# EAGLE board OpenBook_PCB (EAGLE 9.7.0)
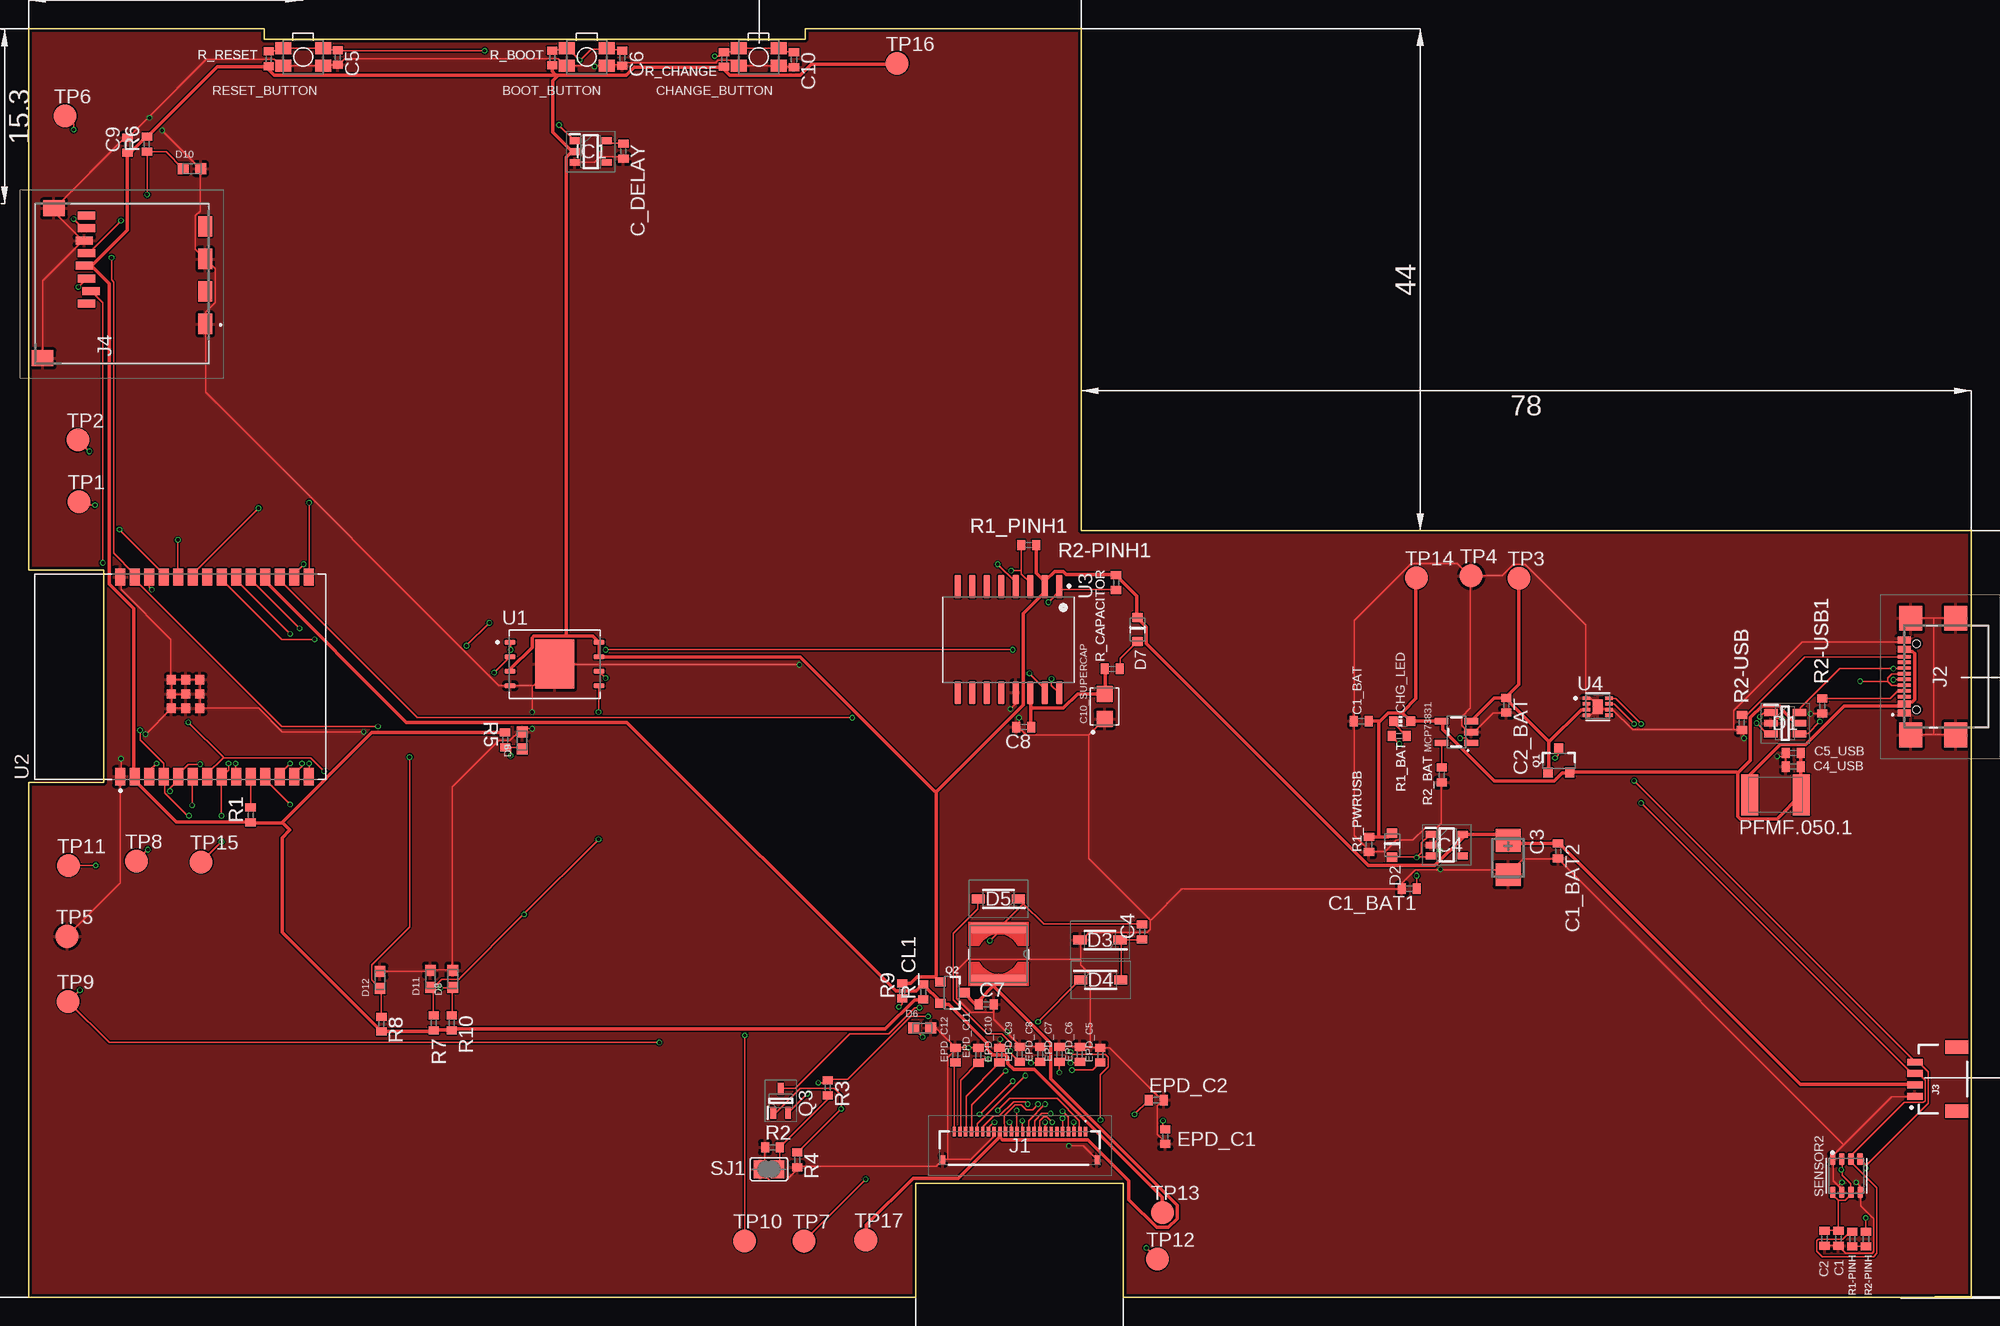
[diagram p0: board, top side]
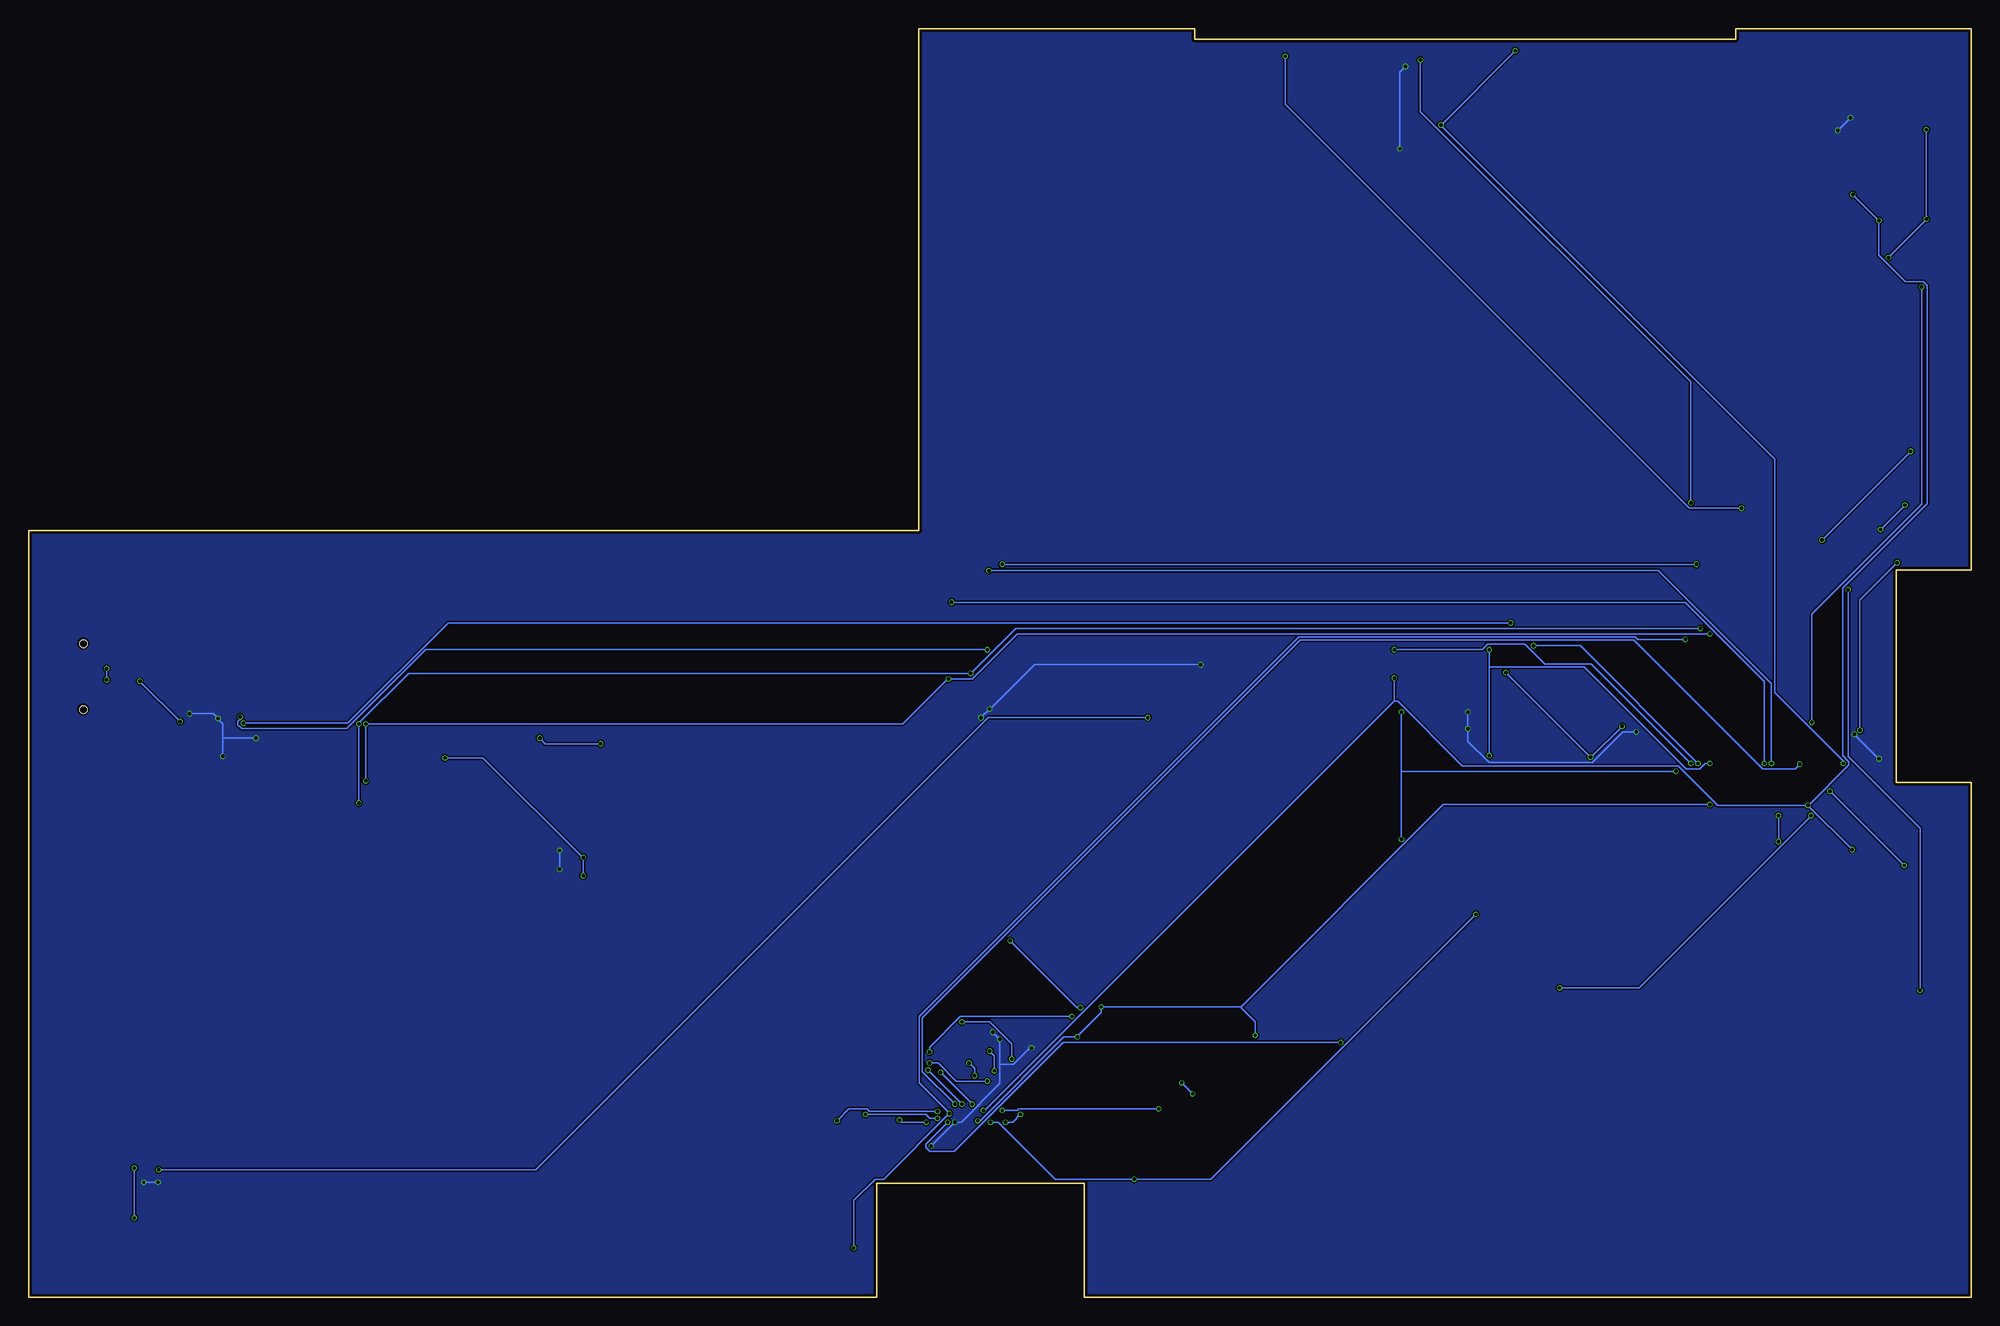
[diagram p1: board, bottom side, seen from below]

Size 170.2 x 111.2 mm. Coordinates in mm from the lower left corner, seen from the top.
Outline: 0,111.2 0,63.75 6.6,63.75 6.6,45.15 0,45.15 0,0 77.71,0 77.71,10 95.91,10 95.91,0 170.2,0 170.2,67.2 92.2,67.2 92.2,111.2 68.03,111.2 68.03,110.26 20.65,110.26 20.65,111.2 0,111.2
Copper layers (1*16): Top 0.035mm / dielectric 1.6mm / Bottom 0.035mm
Design rules "jlcpcb-2layers.dru *": minimum track width 0.15mm, minimum drill 0.3mm, track to track 5mil, track to pad 5mil, pad to pad 5mil, via to via 5mil, smd to smd 5mil, copper to edge 0.2mm, drill to drill 6mil, minimum pad ring 10mil, minimum via ring 3mil, stop-mask expansion 4mil, vias tented up to drill 0mil, thermal gap 10mil
Net classes: 2 POWER: width 0.3 mm

## Footprints (pad centres in the part's own frame; a part is rotated, then mirrored left to right if it is on the bottom)
MYBUTTON = smd 1.4 x 1.05: 1 1.75,0.75; 2 -1.75,0.75; 3 -1.75,-0.75; 4 1.75,-0.75
ESP32_WROVER_EAGLE-LTSPICE_C0402 = smd 0.7 x 0.9: 1 -0.65,0; 2 0.65,0
RCL_CT3528 = smd 2 x 2.2: + -1.5,0; - 1.5,0
CAPCP3225X100N = smd 1.4 x 1.4: 1 -1.1,0; 2 1.1,0
ADAFRUIT_CHIP-LED0603 = smd 0.8 x 0.8: A 0,-0.75; C 0,0.75
SOT95P280X145-6N = smd 1.2 x 0.6: 1 -1.25,0.95; 2 -1.25,0; 3 -1.25,-0.95; 4 1.25,-0.95; 5 1.25,0; 6 1.25,0.95
ESP32_WROVER_AVX---SD0805S020S1R0_AVX_SD0805S020S1R0_0 = smd 0.8 x 0.9: 1 -1.05,0; 2 1.05,0
SOD3716X135N = smd 1.15 x 0.8: 1 -1.75,0; 2 1.75,0
DIOC1608X36N = smd 0.97 x 0.94: 1 -0.75,0; 2 0.75,0
SOT95P280X125-5N = smd 0.9 x 0.6: 1 -1.4,0.95; 2 -1.4,0; 3 -1.4,-0.95; 4 1.4,-0.95; 5 1.4,0.95
SOT95P280X120-5N = smd 0.9 x 0.6: 1 -1.4,0.95; 2 -1.4,0; 3 -1.4,-0.95; 4 1.4,-0.95; 5 1.4,0.95
FH34SRJ24S05SH99 = smd 0.3 x 0.8: 1 5.75,1.45; 2 5.25,1.45; 3 4.75,1.45; 4 4.25,1.45; 5 3.75,1.45; 6 3.25,1.45; 7 2.75,1.45; 8 2.25,1.45; 9 1.75,1.45; 10 1.25,1.45; 11 0.75,1.45; 12 0.25,1.45; 13 -0.25,1.45; 14 -0.75,1.45; 15 -1.25,1.45; 16 -1.75,1.45; 17 -2.25,1.45; 18 -2.75,1.45; 19 -3.25,1.45; 20 -3.75,1.45; 21 -4.25,1.45; 22 -4.75,1.45; 23 -5.25,1.45; 24 -5.75,1.45 | smd 0.4 x 0.8: MP1 6.75,-1.05; MP2 -6.75,-1.05
SAMACSYS_PARTS_USB4110GFA = smd 0.3 x 1.15: A1 -3.35,3.678; A4 -2.55,3.678; A5 -1.25,3.678; A6 -0.25,3.678; A7 0.25,3.678; A8 1.25,3.678; A9 2.55,3.678; A12 3.35,3.678; B1 3.05,3.678; B4 2.25,3.678; B5 1.75,3.678; B6 0.75,3.678; B7 -0.75,3.678; B8 -1.75,3.678; B9 -2.25,3.678; B12 -3.05,3.678 | smd 2.18 x 2: MP1 -5.11,-0.827; MP2 5.11,-0.827; MP3 -5.11,3.103; MP4 5.11,3.103 | hole 0.65: -2.89,2.603; 2.89,2.603
JST04_1MM_RA = smd 0.6 x 1.35: 1 -1.5,0; 2 -0.5,0; 3 0.5,0; 4 1.5,0 | smd 1.2 x 2: NC1 2.8,-3.675; NC2 -2.8,-3.675
112ATAARR03ATTEND = smd 1.8 x 1.2: G1 10.6,10.4; G2 4.9,10.4; S1 7.75,10.4; S2 2.05,10.4 | smd 1.4 x 1.9: G3 13.6,-3.85; G4 0.45,-2.85 | smd 0.7 x 1.5: P1 8.8,0; P2 7.7,0.4; P3 6.6,0; P4 5.5,-0.2; P5 4.4,0; P6 3.3,-0.2; P7 2.2,0; P8 1.1,0
IND_4828-WE-TPC_WRE = smd 0.889 x 4.826: 1 -2.286,0; 2 2.286,0
ESP32_WROVER_SPARKFUN-IC-POWER_SOT23-5 = smd 0.55 x 1.2: 1 -0.95,-1.3; 2 0,-1.3; 3 0.95,-1.3; 4 0.95,1.3; 5 -0.95,1.3
ESP32C6_VARISTOR_CT/CN1812 = smd 1.5 x 3.6: 1 -2.25,0; 2 2.25,0
ESP32_WROVER_SPARKFUN-DISCRETESEMI_SOT23-3 = smd 0.8 x 0.9: 1 -0.95,-1; 2 0.95,-1; 3 0,1.1
SOT65P210X110-3N = smd 1.05 x 0.5: 1 -1.05,0.65; 2 -1.05,-0.65; 3 1.05,0
ESP32_WROVER_BME680_PSON80P300X300X100-8N = smd 1.016 x 0.5: 1 1.458,1.2; 2 1.458,0.4; 3 1.458,-0.4; 4 1.458,-1.2; 5 -1.458,-1.22; 6 -1.458,-0.4; 7 -1.458,0.4; 8 -1.458,1.2
SJ = smd 1.168 x 1.6: 1 -0.762,0; 2 0.762,0
TP20R = smd 2 x 2: TP 0,0
SON127P600X800X80-9N = smd 0.94 x 0.44: 1 -3.895,1.905; 2 -3.895,0.635; 3 -3.895,-0.635; 4 -3.895,-1.905; 5 3.895,-1.905; 6 3.895,-0.635; 7 3.895,0.635; 8 3.895,1.905 | smd 3.4 x 4.3: 9 0,0
XCVR_ESP32-C6-WROOM-1-N8 = smd 1.5 x 0.9: 1 -8.75,5.26; 2 -8.75,3.99; 3 -8.75,2.72; 4 -8.75,1.45; 5 -8.75,0.18; 6 -8.75,-1.09; 7 -8.75,-2.36; 8 -8.75,-3.63; 9 -8.75,-4.9; 10 -8.75,-6.17; 11 -8.75,-7.44; 12 -8.75,-8.71; 13 -8.75,-9.98; 14 -8.75,-11.25; 15 8.75,-11.25; 16 8.75,-9.98; 17 8.75,-8.71; 18 8.75,-7.44; 19 8.75,-6.17; 20 8.75,-4.9; 21 8.75,-3.63; 22 8.75,-2.36; 23 8.75,-1.09; 24 8.75,0.18; 25 8.75,1.45; 26 8.75,2.72; 27 8.75,3.99; 28 8.75,5.26 | smd 0.8 x 0.8: 29_1 -2.755,0.79; 29_2 -1.505,0.79; 29_3 -0.255,0.79; 29_4 -2.755,-0.46; 29_5 -1.505,-0.46; 29_6 -0.255,-0.46; 29_7 -2.755,-1.71; 29_8 -1.505,-1.71; 29_9 -0.255,-1.71
SOIC127P1032X265-16N = smd 2.05 x 0.59: 1 -4.655,4.445; 2 -4.655,3.175; 3 -4.655,1.905; 4 -4.655,0.635; 5 -4.655,-0.635; 6 -4.655,-1.905; 7 -4.655,-3.175; 8 -4.655,-4.445; 9 4.655,-4.445; 10 4.655,-3.175; 11 4.655,-1.905; 12 4.655,-0.635; 13 4.655,0.635; 14 4.655,1.905; 15 4.655,3.175; 16 4.655,4.445
SON50P200X200X80-9N = smd 0.76 x 0.3: 1 -0.985,0.75; 2 -0.985,0.25; 3 -0.985,-0.25; 4 -0.985,-0.75; 5 0.985,-0.75; 6 0.985,-0.25; 7 0.985,0.25; 8 0.985,0.75 | smd 0.9 x 1.3: 9 0,0

## Placement (x,y rotation side)
BOOT_BUTTON  BUTTON_CUSYOMV11  [MYBUTTON]  48.9,108.71 180 top
C1  100nF  [ESP32_WROVER_EAGLE-LTSPICE_C0402]  158.55,5.18 270 top
C1_BAT  4.7uF  [ESP32_WROVER_EAGLE-LTSPICE_C0402]  116.74,50.5 180 top
C1_BAT1  4.7uF  [ESP32_WROVER_EAGLE-LTSPICE_C0402]  120.95,35.82 180 top
C1_BAT2  4.7uF  [ESP32_WROVER_EAGLE-LTSPICE_C0402]  133.99,39.12 270 top
C2  100nF  [ESP32_WROVER_EAGLE-LTSPICE_C0402]  157.33,5.18 270 top
C2_BAT  4.7uF  [ESP32_WROVER_EAGLE-LTSPICE_C0402]  129.45,51.9 270 top
C3  100uF TANT  [RCL_CT3528]  129.61,38.55 270 top
C4  4.7uF/25V  [ESP32_WROVER_EAGLE-LTSPICE_C0402]  97.55,32.04 90 top
C4_USB  100nF  [ESP32_WROVER_EAGLE-LTSPICE_C0402]  154.6,46.52 180 top
C5  1uF  [ESP32_WROVER_EAGLE-LTSPICE_C0402]  27.09,108.66 270 top
C5_USB  4.7uF  [ESP32_WROVER_EAGLE-LTSPICE_C0402]  154.58,47.72 180 top
C6  100nF  [ESP32_WROVER_EAGLE-LTSPICE_C0402]  52.01,108.61 270 top
C7  10uF  [ESP32_WROVER_EAGLE-LTSPICE_C0402]  83.9,25.68 0 top
C8  100nF  [ESP32_WROVER_EAGLE-LTSPICE_C0402]  87.19,49.98 180 top
C9  100nF  [ESP32_WROVER_EAGLE-LTSPICE_C0402]  8.67,100.98 90 top
C10  100nF  [ESP32_WROVER_EAGLE-LTSPICE_C0402]  67.05,108.48 270 top
C10_SUPERCAP  CPH3225A  [CAPCP3225X100N]  94.26,51.79 90 top
C_DELAY  100nF  [ESP32_WROVER_EAGLE-LTSPICE_C0402]  52.11,100.44 270 top
CHANGE_BUTTON  BUTTON_CUSYOMV11  [MYBUTTON]  63.96,108.71 180 top
CHG_LED  [ADAFRUIT_CHIP-LED0603]  120.34,50.5 90 top
D1  USBLC6-2SC6Y  [SOT95P280X145-6N]  153.88,50.32 0 top
D2  ESP32_WROVER_AVX---SD0805S020S1R0_AVX_SD0805S020S1R0_0_0  [ESP32_WROVER_AVX---SD0805S020S1R0_AVX_SD0805S020S1R0_0]  119.45,39.63 270 top
D3  MBR05301  [SOD3716X135N]  93.86,31.32 180 top
D4  MBR05301  [SOD3716X135N]  93.92,27.83 0 top
D5  MBR05301  [SOD3716X135N]  84.96,34.93 180 top
D6  PGB1010603MR1  [DIOC1608X36N]  78.28,23.62 0 top
D7  ESP32_WROVER_AVX---SD0805S020S1R0_AVX_SD0805S020S1R0_0_0  [ESP32_WROVER_AVX---SD0805S020S1R0_AVX_SD0805S020S1R0_0]  97.14,58.53 270 top
D8  PGB1010603MR1  [DIOC1608X36N]  37.16,27.92 90 top
D9  PGB1010603MR1  [DIOC1608X36N]  43.24,48.82 90 top
D10  PGB1010603MR1  [DIOC1608X36N]  14.32,98.92 0 top
D11  PGB1010603MR1  [DIOC1608X36N]  35.2,27.92 90 top
D12  PGB1010603MR1  [DIOC1608X36N]  30.78,27.82 90 top
EPD_C1  1uF/50V  [ESP32_WROVER_EAGLE-LTSPICE_C0402]  99.58,14.1 270 top
EPD_C2  1uF/50V  [ESP32_WROVER_EAGLE-LTSPICE_C0402]  98.79,17.3 0 top
EPD_C5  0.1uF/50V  [ESP32_WROVER_EAGLE-LTSPICE_C0402]  93.89,21.24 90 top
EPD_C6  1uF/50V  [ESP32_WROVER_EAGLE-LTSPICE_C0402]  92.1,21.3 90 top
EPD_C7  1uF/50V  [ESP32_WROVER_EAGLE-LTSPICE_C0402]  90.31,21.3 90 top
EPD_C8  1uF/50V  [ESP32_WROVER_EAGLE-LTSPICE_C0402]  88.62,21.3 90 top
EPD_C9  1uF/50V  [ESP32_WROVER_EAGLE-LTSPICE_C0402]  86.83,21.3 90 top
EPD_C10  1uF/50V  [ESP32_WROVER_EAGLE-LTSPICE_C0402]  85.05,21.24 90 top
EPD_C11  1uF/50V  [ESP32_WROVER_EAGLE-LTSPICE_C0402]  83.21,21.22 90 top
EPD_C12  1uF/50V  [ESP32_WROVER_EAGLE-LTSPICE_C0402]  81.19,21.24 90 top
IC1  BD5229G-TR  [SOT95P280X125-5N]  49.25,100.42 0 top
IC4  XC6220A331MR-G  [SOT95P280X120-5N]  124.23,39.64 0 top
J1  FH34SRJ-24S-0.5SH_99_  [FH34SRJ24S05SH99]  86.84,13.09 0 top
J2  SAMACSYS_PARTS_USB4110-GF-A  [SAMACSYS_PARTS_USB4110GFA]  167.99,54.41 90 top
J3  QWIIC_RIGHT_ANGLE  [JST04_1MM_RA]  165.25,19.13 90 top
J4  112A-TAAR-R03_ATTEND  [112ATAARR03ATTEND]  5.08,95.9 270 top
L1  68uH  [IND_4828-WE-TPC_WRE]  84.97,30.1 270 top
MCP73831  ESP32_WROVER_SPARKFUN-IC-POWER_MCP73831  [ESP32_WROVER_SPARKFUN-IC-POWER_SOT23-5]  125.08,49.54 90 top
PFMF.050.1  ESP32C6_VARISTORCN1812  [ESP32C6_VARISTOR_CT/CN1812]  153.04,44.05 0 top
Q1  20V/4.2A/52mΩ/1.4W  [ESP32_WROVER_SPARKFUN-DISCRETESEMI_SOT23-3]  134.06,47.01 0 top
Q2  20V/4.2A/52mΩ/1.4W  [ESP32_WROVER_SPARKFUN-DISCRETESEMI_SOT23-3]  80.88,26.71 270 top
Q3  SI1308EDL-T1-GE3  [SOT65P210X110-3N]  65.89,17.23 90 top
R1  10K  [ESP32_WROVER_EAGLE-LTSPICE_C0402]  19.45,42.27 90 top
R1-PINH  10K  [ESP32_WROVER_EAGLE-LTSPICE_C0402]  159.75,5.12 270 top
R1_BAT  200  [ESP32_WROVER_EAGLE-LTSPICE_C0402]  120.06,49.2 0 top
R1_PINH1  10K  [ESP32_WROVER_EAGLE-LTSPICE_C0402]  87.61,65.94 0 top
R1_PWRUSB  100K  [ESP32_WROVER_EAGLE-LTSPICE_C0402]  117.42,39.69 90 top
R2  2.2  [ESP32_WROVER_EAGLE-LTSPICE_C0402]  65.17,13.16 0 top
R2-PINH  10K  [ESP32_WROVER_EAGLE-LTSPICE_C0402]  160.96,5.12 270 top
R2-PINH1  10K  [ESP32_WROVER_EAGLE-LTSPICE_C0402]  95.27,62.64 90 top
R2-USB  5k1  [ESP32_WROVER_EAGLE-LTSPICE_C0402]  150.09,50.38 270 top
R2-USB1  5k1  [ESP32_WROVER_EAGLE-LTSPICE_C0402]  157.13,51.82 90 top
R2_BAT  2K  [ESP32_WROVER_EAGLE-LTSPICE_C0402]  123.8,45.78 90 top
R3  0.47  [ESP32_WROVER_EAGLE-LTSPICE_C0402]  70.02,18.38 270 top
R4  10K  [ESP32_WROVER_EAGLE-LTSPICE_C0402]  67.33,12.06 270 top
R5  10K  [ESP32_WROVER_EAGLE-LTSPICE_C0402]  41.75,48.86 90.6 top
R6  10K  [ESP32_WROVER_EAGLE-LTSPICE_C0402]  10.37,101.06 90 top
R7  10K  [ESP32_WROVER_EAGLE-LTSPICE_C0402]  35.49,24.06 270 top
R8  10K  [ESP32_WROVER_EAGLE-LTSPICE_C0402]  30.91,23.96 270 top
R9  10K  [ESP32_WROVER_EAGLE-LTSPICE_C0402]  76.53,26.86 90 top
R10  10K  [ESP32_WROVER_EAGLE-LTSPICE_C0402]  37.07,24.06 270 top
R_BOOT  10K  [ESP32_WROVER_EAGLE-LTSPICE_C0402]  45.87,108.62 90 top
R_CAPACITOR  15  [ESP32_WROVER_EAGLE-LTSPICE_C0402]  94.92,55.09 0 top
R_CHANGE  10K  [ESP32_WROVER_EAGLE-LTSPICE_C0402]  60.93,108.49 90 top
R_CL1  10K  [ESP32_WROVER_EAGLE-LTSPICE_C0402]  78.37,26.78 90 top
R_RESET  10K  [ESP32_WROVER_EAGLE-LTSPICE_C0402]  21.03,108.54 90 top
RESET_BUTTON  BUTTON_CUSYOMV11  [MYBUTTON]  24.06,108.71 180 top
SENSOR2  ESP32_WROVER_BME680_BME680  [ESP32_WROVER_BME680_PSON80P300X300X100-8N]  159.24,10.67 90 top
SJ1  [SJ]  64.86,11.24 0 top
TP1  TP  [TP20R]  4.41,69.74 0 top
TP2  TP  [TP20R]  4.33,75.14 0 top
TP3  TP  [TP20R]  130.55,63.04 0 top
TP4  TP  [TP20R]  126.37,63.24 0 top
TP5  TP  [TP20R]  3.39,31.64 0 top
TP6  TP  [TP20R]  3.21,103.54 0 top
TP7  TP  [TP20R]  67.93,4.94 0 top
TP8  TP  [TP20R]  9.45,38.24 0 top
TP9  TP  [TP20R]  3.47,25.94 0 top
TP10  TP  [TP20R]  62.72,4.96 0 top
TP11  TP  [TP20R]  3.49,37.84 0 top
TP12  TP  [TP20R]  98.89,3.36 0 top
TP13  TP  [TP20R]  99.32,7.46 0 top
TP14  TP  [TP20R]  121.57,63.06 0 top
TP15  TP  [TP20R]  15.12,38.16 0 top
TP16  TP  [TP20R]  76.09,108.14 0 top
TP17  TP  [TP20R]  73.34,5.04 0 top
U1  W25Q512JVEIQ  [SON127P600X800X80-9N]  46.09,55.51 0 top
U2  ESP32-C6-WROOM-1-N8  [XCVR_ESP32-C6-WROOM-1-N8]  13.3,54.39 90 top
U3  DS3231SN#  [SOIC127P1032X265-16N]  85.85,57.65 270 top
U4  MAX17048G+T10  [SON50P200X200X80-9N]  137.47,51.77 0 top

## Library data of the parts
BOOT_BUTTON C1 C1_BAT C1_BAT1 C1_BAT2 C2 C2_BAT C4 C4_USB C5 C5_USB C6-C10 C_DELAY CHANGE_BUTTON CHG_LED D2-D12 EPD_C1 EPD_C2 EPD_C5-EPD_C12 PFMF.050.1 Q1 Q2 R1 R1-PINH R1_BAT R1_PINH1 R1_PWRUSB R2 R2-PINH R2-PINH1 R2-USB R2-USB1 R2_BAT R3-R10 R_BOOT R_CAPACITOR R_CHANGE R_CL1 R_RESET RESET_BUTTON SJ1 TP1-TP17 = DeskAssistant v19 v1
C3 = DeskAssistant v19 v1; SPICEPREFIX: C
C10_SUPERCAP = DeskAssistant v19 v1; AVAILABILITY: Not in stock; CHECK_PRICES: https://www.snapeda.com/parts/CPH3225A/Seiko+Instruments/view-part/?ref=eda; DESCRIPTION: 11 mF (EDLC) Supercapacitor 3.3 V 1210 (3225 Metric) - -; MF: Seiko Instruments; MP: CPH3225A; PACKAGE: 1210 Seiko; PRICE: None; PURCHASE-URL: https://www.snapeda.com/api/url_track_click_mouser/?unipart_id=562593&manufacturer=Seiko Instruments&part_name=CPH3225A&search_term=None; SNAPEDA_LINK: https://www.snapeda.com/parts/CPH3225A/Seiko+Instruments/view-part/?ref=snap
D1 = DeskAssistant v19 v1; AVAILABILITY: In Stock; CHECK_PRICES: https://www.snapeda.com/parts/USBLC6-2SC6Y/STMicroelectronics/view-part/?ref=eda; DESCRIPTION: 17V Clamp 5A (8/20µs) Ipp Tvs Diode Surface Mount SOT-23-6; MF: STMicroelectronics; MP: USBLC6-2SC6Y; PACKAGE: SOT-23-6 STMicroelectronics; PRICE: None; SNAPEDA_LINK: https://www.snapeda.com/parts/USBLC6-2SC6Y/STMicroelectronics/view-part/?ref=snap
IC1 = DeskAssistant v19 v1; DESCRIPTION: Voltage Detector with Adjustable Delay Time: CMOS processes are utilized to develop high precision, low current consumption CMOS reset ICs that allow arbitrary setting of the delay time. The extensive lineup includes both Nch Open Drain and CMOS output types in a wide range of detection voltages (from 2.3V to 6.0V, in 0.1V steps), enabling selection of the ideal solution based on customer requirements. In addition, the entire series is of course both lead-free and RoHS-compliant.; HEIGHT: 1.25mm; MANUFACTURER_NAME: ROHM Semiconductor; MANUFACTURER_PART_NUMBER: BD5229G-TR; MOUSER_PART_NUMBER: 755-BD5229G-TR; MOUSER_PRICE-STOCK: https://www.mouser.co.uk/ProductDetail/ROHM-Semiconductor/BD5229G-TR?qs=4kLU8WoGk0vvnhrrYwdszw%3D%3D
IC4 = DeskAssistant v19 v1; DESCRIPTION: LDO Voltage Regulators; HEIGHT: 1.2mm; MANUFACTURER_NAME: Torex; MANUFACTURER_PART_NUMBER: XC6220A331MR-G; MOUSER_PART_NUMBER: 865-XC6220A331MR-G; MOUSER_PRICE-STOCK: https://www.mouser.co.uk/ProductDetail/Torex-Semiconductor/XC6220A331MR-G?qs=AsjdqWjXhJ8ZSWznL1J0gg%3D%3D
J1 = DeskAssistant v19 v1; DESCRIPTION: 24 Position FFC, FPC Connector Contacts, Top and Bottom 0.020" (0.50mm) Surface Mount, Right Angle; HEIGHT: 1.1mm; MANUFACTURER_NAME: Hirose; MANUFACTURER_PART_NUMBER: FH34SRJ-24S-0.5SH(99); MOUSER_PART_NUMBER: 798-FH34SRJ24S05SH99; MOUSER_PRICE-STOCK: https://www.mouser.co.uk/ProductDetail/Hirose-Connector/FH34SRJ-24S-0.5SH99?qs=vcbW%252B4%252BSTIpKBl5ap9J8Fw%3D%3D
J2 = DeskAssistant v19 v1; DESCRIPTION: CONN USB 2.0 TYPE-C R/A SMT; HEIGHT: 3.26mm; MANUFACTURER_NAME: GCT (GLOBAL CONNECTOR TECHNOLOGY); MANUFACTURER_PART_NUMBER: USB4110-GF-A; MOUSER_PART_NUMBER: 640-USB4110-GF-A; MOUSER_PRICE-STOCK: https://www.mouser.co.uk/ProductDetail/GCT/USB4110-GF-A?qs=KUoIvG%2F9IlYiZvIXQjyJeA%3D%3D
J3 = DeskAssistant v19 v1; PROD_ID: CONN-13694
J4 = DeskAssistant v19 v1; DESCRIPTION: Micro SD Card Socket, Push-Push Type, Top Mount, SMT, H=1.83mm, 10u; HEIGHT: 1.9mm; MANUFACTURER_NAME: ATTEND; MANUFACTURER_PART_NUMBER: 112A-TAAR-R03 ATTEND
L1 = DeskAssistant v19 v1; COPYRIGHT: Copyright (C) 2024 Ultra Librarian. All rights reserved.; MANUFACTURER_PART_NUMBER: 744043680; MFR_NAME: Wurth Electronics
MCP73831 = DeskAssistant v19 v1; PROD_ID: IC-09995
Q3 = DeskAssistant v19 v1; AVAILABILITY: In Stock; CHECK_PRICES: https://www.snapeda.com/parts/SI1308EDL-T1-GE3/Vishay+Siliconix/view-part/?ref=eda; DESCRIPTION: Si1308EDL-T1-GE3 N-channel MOSFET Transistor, 1.5 A, 30 V, 3-Pin SC-70 | Siliconix / Vishay SI1308EDL-T1-GE3; MF: Vishay Siliconix; MP: SI1308EDL-T1-GE3; PACKAGE: SOT-323 Vishay Semiconductor; PRICE: None; PURCHASE-URL: https://www.snapeda.com/api/url_track_click_mouser/?unipart_id=274603&manufacturer=Vishay Siliconix&part_name=SI1308EDL-T1-GE3&search_term=None; SNAPEDA_LINK: https://www.snapeda.com/parts/SI1308EDL-T1-GE3/Vishay+Siliconix/view-part/?ref=snap
SENSOR2 = DeskAssistant v19 v1; AVAILABILITY: Unavailable; DESCRIPTION: Integrated Environmental Unit; MF: Bosch Sensortec; MP: BME680; PACKAGE: LGA-8 Bosch Tools; PRICE: None
U1 = DeskAssistant v19 v1; AVAILABILITY: In Stock; CHECK_PRICES: https://www.snapeda.com/parts/W25Q512JVEIQ/Winbond+Electronics/view-part/?ref=eda; DESCRIPTION: FLASH - NOR Memory IC 512Mb (64M x 8) SPI - Quad I/O 133 MHz 8-WSON (8x6); MF: Winbond Electronics; MP: W25Q512JVEIQ; PACKAGE: Package; PRICE: None; SNAPEDA_LINK: https://www.snapeda.com/parts/W25Q512JVEIQ/Winbond+Electronics/view-part/?ref=snap
U2 = DeskAssistant v19 v1; AVAILABILITY: In Stock; CHECK_PRICES: https://www.snapeda.com/parts/ESP32-C6-WROOM-1-N8/Espressif+Systems/view-part/?ref=eda; DESCRIPTION: Multiprotocol Modules ESP32-C6 module, Wi-Fi 6 in 2.4 GHz band, Bluetooth 5, Zigbee 3.0 and Thread. ESP34-WROOM Compatible - ENGINEERING SAMPLE; MF: Espressif Systems; MP: ESP32-C6-WROOM-1-N8; PACKAGE: None; PRICE: None; SNAPEDA_LINK: https://www.snapeda.com/parts/ESP32-C6-WROOM-1-N8/Espressif+Systems/view-part/?ref=snap
U3 = DeskAssistant v19 v1; AVAILABILITY: In Stock; CHECK_PRICES: https://www.snapeda.com/parts/DS3231SN%23/Analog+Devices/view-part/?ref=eda; DESCRIPTION: Extremely Accurate I²C-Integrated RTC/TCXO/Crystal; MF: Analog Devices; MP: DS3231SN#; PACKAGE: SOIC-16 Maxim; PRICE: None; PURCHASE-URL: https://www.snapeda.com/api/url_track_click_mouser/?unipart_id=99048&manufacturer=Analog Devices&part_name=DS3231SN#&search_term=None; SNAPEDA_LINK: https://www.snapeda.com/parts/DS3231SN%23/Analog+Devices/view-part/?ref=snap
U4 = DeskAssistant v19 v1; AVAILABILITY: In Stock; CHECK_PRICES: https://www.snapeda.com/parts/MAX17048G+T10/Analog+Devices/view-part/?ref=eda; DESCRIPTION: 3µA 1-Cell/2-Cell Fuel Gauge with ModelGauge; MF: Analog Devices; MP: MAX17048G+T10; PACKAGE: TDFN-8 Maxim; PRICE: None; PURCHASE-URL: https://www.snapeda.com/api/url_track_click_mouser/?unipart_id=329239&manufacturer=Analog Devices&part_name=MAX17048G+T10&search_term=None; SNAPEDA_LINK: https://www.snapeda.com/parts/MAX17048G+T10/Analog+Devices/view-part/?ref=snap

## Nets
2C_PW: R1-PINH.2 R2-PINH.2
3V3 [POWER]: C1_BAT2.1 C3.+ C9.1 D7.1 IC1.2 IC4.5 J3.2 J4.P4 Q2.1 R1.1 R1_PINH1.2 R2-PINH1.2 R5.2 R6.2 R7.2 R8.2 R9.2 R10.2 R_BOOT.1 R_CHANGE.1 R_CL1.1 R_RESET.1 TP16.TP U1.3 U1.7 U1.8 U2.2 U3.2
32KHZ: R2-PINH1.1 U2.9 U3.1
DN: D1.4 J2.A7 J2.B7
DP: D1.6 J2.A6 J2.B6
EPD_3V3 [POWER]: C7.1 J1.16 L1.2 Q2.3 TP17.TP
EPD_3V3_C [POWER]: Q2.2 R_CL1.2 TP13.TP U2.18
EPD_BUSY: J1.9 TP9.TP U2.26
EPD_CS: D6.1 J1.12 R9.1 TP10.TP U2.11
EPD_DC: J1.11 TP11.TP U2.5
EPD_RST: J1.10 TP12.TP U2.21
FLASH_CS: D9.1 R5.1 U1.1 U2.12
GDR: J1.2 Q3.1 R4.1
GND: BOOT_BUTTON.1 BOOT_BUTTON.2 C1.2 C1_BAT1.2 C1_BAT2.2 C1_BAT.2 C2.2 C2_BAT.2 C3.- C4_USB.2 C5.2 C5_USB.2 C6.2 C7.2 C8.2 C9.2 C10.2 C10_SUPERCAP.1 C_DELAY.2 CHANGE_BUTTON.1 CHANGE_BUTTON.2 D1.2 D3.2 D6.2 D8.2 D9.2 D10.2 D11.2 D12.2 EPD_C1.2 EPD_C2.2 EPD_C5.2 EPD_C6.2 EPD_C7.2 EPD_C8.2 EPD_C9.2 EPD_C10.2 EPD_C11.2 EPD_C12.2 IC1.3 IC4.2 J1.8 J1.17 J1.MP1 J1.MP2 J2.A1 J2.A12 J2.B1 J2.B12 J2.MP1 J2.MP2 J2.MP3 J2.MP4 J3.1 J4.G1 J4.G2 J4.G3 J4.G4 J4.P6 MCP73831.2 R1_PWRUSB.1 R2-USB1.1 R2-USB.2 R2.1 R2_BAT.1 R4.2 RESET_BUTTON.1 RESET_BUTTON.2 SENSOR2.1 SENSOR2.5 SENSOR2.7 SJ1.1 TP4.TP TP5.TP U1.4 U1.9 U2.1 U2.28 U2.29_1 U2.29_2 U2.29_3 U2.29_4 U2.29_5 U2.29_6 U2.29_7 U2.29_8 U2.29_9 U3.13 U4.1 U4.4 U4.6 U4.9
GPIO8: R1.2 U2.10
I2C_PW: C1.1 C2.1 SENSOR2.2 SENSOR2.6 SENSOR2.8 U2.17
INT_RTC: R1_PINH1.1 TP15.TP U2.8 U3.3
IO/BOOT: BOOT_BUTTON.3 BOOT_BUTTON.4 C6.1 R_BOOT.2 U2.15
IO/CHANGE: C10.1 CHANGE_BUTTON.3 CHANGE_BUTTON.4 R_CHANGE.2 U2.23
MISO: D12.1 J4.P7 R8.1 TP6.TP U1.2 U2.27
MOSI: D11.1 J1.14 J4.P3 R7.1 TP7.TP U1.5 U2.7
N$1: J2.A5 R2-USB1.2
N$2: J2.B5 R2-USB.1
N$3: C1_BAT1.1 D2.2 IC4.1 IC4.3 Q1.3
N$4: MCP73831.1 R1_BAT.1
N$5: CHG_LED.C R1_BAT.2
N$6: C4.1 D3.1 D4.2
N$7: EPD_C12.1 J1.24
N$8: MCP73831.5 R2_BAT.2
N$9: EPD_C6.1 J1.18
N$10: EPD_C7.1 J1.19
N$11: EPD_C8.1 J1.20
N$12: C_DELAY.1 IC1.5
N$13: EPD_C10.1 J1.22
N$14: D7.2 R_CAPACITOR.2
N$16: EPD_C5.1 J1.15
N$17: EPD_C2.1 J1.5
N$18: EPD_C1.1 J1.4
PREVGH: D5.2 EPD_C9.1 J1.21
PREVGL: D4.1 EPD_C11.1 J1.23
RESE: J1.3 Q3.2 R3.1
RESE': R2.2 R3.2 SJ1.2
RESET: C5.1 IC1.1 R_RESET.2 RESET_BUTTON.3 RESET_BUTTON.4 U2.3
RTC_RST: U2.16 U3.4
RX: TP2.TP U2.24
SCK: D10.1 J1.13 J4.P5 R6.1 TP8.TP U1.6 U2.6
SCL: J3.4 R2-PINH.1 SENSOR2.4 U2.20 U3.16 U4.7
SDA: J3.3 R1-PINH.1 SENSOR2.3 U2.19 U3.15 U4.8
SRC: C4.2 D5.1 L1.1 Q3.3
SS_SD: D8.1 J4.P2 R10.1 U2.4
TX: TP1.TP U2.25
USB_D+: D1.1 U2.14
USB_D-: D1.3 U2.13
VBAT [POWER]: C2_BAT.1 MCP73831.3 Q1.1 TP3.TP U4.2 U4.3
VBUS [POWER]: C1_BAT.1 C4_USB.1 C5_USB.1 CHG_LED.A D1.5 D2.1 MCP73831.4 PFMF.050.1.2 Q1.2 R1_PWRUSB.2 TP14.TP
VRTC [POWER]: C8.1 C10_SUPERCAP.2 R_CAPACITOR.1 U3.14
VUSB [POWER]: J2.A4 J2.A9 J2.B4 J2.B9 PFMF.050.1.1

## Tracks (layer width: path | path; a pad name or v marks a point on that pad's centre or on a via)
2C_PW
  Top 0.15: R1-PINH.2 159.76,4.48 160.94,4.48 R2-PINH.2
3V3
  Top 0.3: 22.2,41.64 22.16,41.6 19.6,41.6 R1.1 19.39,41.67 12.95,41.67 9.35,45.27 9.35,45.62 U2.2 9.21,45.75 9.21,60.37 7.06,62.51 7.06,88.83 5.61,90.28 J4.P4 4.92,90.42 5.54,90.42 8.66,93.54 8.66,100.19 C9.1 8.73,100.39 9,100.39 10.32,101.71 R6.2 10.46,101.78 16.55,107.87 20.98,107.87 R_RESET.1 21.05,107.73 21.05,107.59 21.54,107.11 46.2,107.11 | 22.2,41.64 30.05,49.49 41.69,49.49 R5.2 | R_CL1.1 78.32,26.09 77.63,26.09 75.07,23.52 37.19,23.52 R10.2 37.05,23.46 35.59,23.46 R7.2 35.46,23.39 35.39,23.32 30.95,23.32 R8.2 30.82,23.39 22.23,31.97 22.23,40.28 22.9,40.95 22.2,41.64 | 45.91,107.94 R_BOOT.1 45.87,107.44 46.2,107.11 | 46.4,107.11 52.35,107.11 53.05,107.8 60.87,107.8 R_CHANGE.1 60.87,107.66 61.42,107.11 67.59,107.11 68.56,108.08 76.04,108.08 TP16.TP | 46.4,107.11 46.2,107.11 | J3.2 165.23,18.68 155.19,18.68 134.14,39.73 C1_BAT2.1 133.93,39.8 129.84,39.8 129.71,39.94 C3.+ 129.57,40.08 129.08,40.56 125.69,40.56 IC4.5 125.62,40.42 125.62,40.28 123.2,37.86 117.38,37.86 97.92,57.32 97.92,58.77 97.23,59.47 D7.1 97.09,59.6 97.09,61.48 95.29,63.27 R2-PINH1.2 95.15,63.34 90.92,63.34 90.65,63.62 89.89,63.62 89.12,62.86 U3.2 | 47.09,57.94 49.44,57.94 49.93,57.46 U1.8 50,57.32 50,56.21 U1.7 50.14,56.14 67.59,56.14 79.36,44.37 79.5,44.3 | 47.09,57.94 44.25,57.94 44.11,57.8 44.11,56.97 42.24,55.1 42.24,54.9 U1.3 | 79.43,28.1 77.84,28.1 77.28,27.54 76.59,27.54 R9.2 | 79.43,28.1 79.84,27.68 Q2.1 | R1_PINH1.2 88.29,65.91 88.29,63.48 88.99,62.79 88.99,62.31 U3.2 | 79.5,44.3 79.5,28.23 79.43,28.1 | 79.5,44.3 87.12,51.92 87.12,59.95 88.92,61.75 88.92,62.17 U3.2
  Top 0.3: 47.09,57.94 47.09,99.91 47.51,100.32 IC1.2 47.78,100.46 47.58,100.46 45.91,102.12 45.9,102.12 45.9,106.61 46.4,107.11
32KHZ  (via drill 0.3)
  Top 0.15: R2-PINH1.1 95.22,62.03 90.51,62.03 90.3,62.24 U3.1 90.44,62.03 v89.33,60.92 | v18.14,46.79 18.14,45.69 U2.9
  Bottom 0.15: v18.14,46.79 18.14,54 25.07,60.92 v89.33,60.92
DN  (via drill 0.3)
  Top 0.15: 162.88,54 163.22,53.65 164.26,53.65 J2.B7 | 162.88,54 162.88,54.27 163.22,54.62 164.26,54.62 J2.A7 | v156.92,50.46 155.88,49.42 155.19,49.42 D1.4 | 162.88,54 v160.45,54
  Bottom 0.15: v160.45,54 v156.92,50.46
DP  (via drill 0.3)
  Top 0.15: v163.36,54.13 164.26,54.13 J2.A6 | J2.B6 164.26,55.1 v163.36,55.1 158.65,55.1 155.19,51.64 155.19,51.3 D1.6
  Bottom 0.15: v163.36,55.1 v163.36,54.13
EPD_3V3
  Top 0.3: Q2.3 81.99,26.64 82.89,25.74 83.24,25.74 C7.1 83.31,25.88 83.31,26.09 84.52,27.3 | 84.52,27.3 84.97,27.75 L1.2 | 85.04,14.04 85.04,14.52 J1.16 | 85.04,14.04 81.44,10.44 77.49,10.44 73.41,6.35 73.41,5.1 TP17.TP | 84.52,27.3 89.54,22.28 89.54,19.16 100.62,8.08 100.62,6.91 99.86,6.14 98.82,6.14 96.4,8.57 96.4,10.23 92.8,13.83 85.32,13.83 85.18,13.97 85.04,14.04
EPD_3V3_C
  Top 0.3: U2.18 20.77,63.14 20.77,62.72 33.1,50.39 52.42,50.39 75.97,26.85 77.77,26.85 78.25,27.33 R_CL1.2 78.39,27.4 79.84,25.95 79.84,25.81 Q2.2 79.98,25.67 80.61,25.67 84,22.28 84,21.72 84.48,21.24 85.59,21.24 85.8,21.03 85.8,20.48 86.28,19.99 88.09,19.99 99.31,8.77 99.31,7.53 TP13.TP
EPD_BUSY  (via drill 0.3)
  Top 0.15: v89.68,15.35 89.19,15.84 88.92,15.84 88.57,15.49 88.57,14.59 J1.9 | v55.26,22.35 7.06,22.35 3.53,25.88 TP9.TP 3.53,25.95 v4.5,26.92 | v10.8,62.03 10.6,62.24 10.6,63.14 U2.26
  Bottom 0.15: v89.68,15.35 91.62,13.41 91.62,13.14 91.27,12.79 89.12,12.79 79.57,22.35 v55.26,22.35 | v10.8,62.03 10.8,47.42 4.5,41.11 v4.5,26.92
EPD_CS  (via drill 0.3)
  Top 0.15: v87.05,15.49 87.05,14.59 J1.12 | v78.32,22.83 77.56,23.59 D6.1 | v76.24,25.46 76.52,25.74 76.52,26.16 R9.1 | v22.92,43.19 20.77,45.34 20.77,45.62 U2.11 | v62.74,22.97 62.74,4.97 TP10.TP
  Bottom 0.15: v87.05,15.49 86.84,15.49 79.5,22.83 v78.32,22.83 78.32,22.9 76.24,24.98 v76.24,25.46 63.99,25.46 | v22.92,43.19 46.26,43.19 63.99,25.46 | v62.74,22.97 62.74,24.15 63.99,25.39 63.99,25.46
EPD_DC  (via drill 0.3)
  Top 0.15: v89.06,16.95 87.6,15.49 87.6,14.59 J1.11 | v15.03,46.72 13.99,46.72 13.16,45.89 13.16,45.69 U2.5 13.09,45.62 13.09,45.34 12.4,44.65 v12.4,44.37 | v5.89,37.86 3.53,37.86 TP11.TP
  Bottom 0.15: v89.06,16.95 91.89,19.79 91.89,24.49 58.79,57.6 29.57,57.6 18.28,46.31 15.44,46.31 v15.03,46.72 | v12.4,44.37 v5.89,37.86
EPD_RST  (via drill 0.3)
  Top 0.15: v89.54,16.12 88.78,16.12 88.16,15.49 88.16,14.59 J1.10 | v97.92,4.34 98.89,3.37 TP12.TP | v25.07,57.67 22.16,57.67 16.97,62.86 16.97,63.14 U2.21
  Bottom 0.15: v97.92,4.34 97.92,8.5 96.05,10.37 95.29,10.37 v89.54,16.12 89.54,16.18 92.17,18.82 92.17,24.63 58.93,57.87 29.43,57.87 29.22,57.67 v25.07,57.67
FLASH_CS  (via drill 0.3)
  Top 0.15: 42.24,48.18 43.14,48.18 43.21,48.11 D9.1 | 42.24,48.18 41.76,48.18 R5.1 | v42.24,56.77 42.24,57.39 U1.1 | 42.24,48.18 v42.24,47.49 | v22.92,46.79 22.02,45.89 22.02,45.69 U2.12
  Bottom 0.15: v42.24,47.49 42.24,55.24 | 42.24,55.24 v42.24,56.77 | v22.92,46.79 23.34,46.79 23.82,46.31 25,46.31 33.93,55.24 42.24,55.24
GDR  (via drill 0.3)
  Top 0.15: v84.9,16.39 85.94,17.43 90.09,17.43 92.03,15.49 92.03,14.59 J1.2 | R4.1 67.38,12.72 v71.19,16.53 71.19,17.71 70.57,18.33 67.59,18.33 65.44,16.18 65.3,16.18 Q3.1
  Bottom 0.15: v84.9,16.39 83.58,16.39 83.45,16.53 v71.19,16.53
GND  (via drill 0.3)
  Top 0.15: U2.29_3 12.53,54.13 13.71,54.13 U2.29_6 13.78,54.13 14.96,54.13 U2.29_9 15.03,54.13 15.03,52.96 U2.29_8 15.03,52.82 15.03,51.64 U2.29_7 15.1,51.64 20.15,51.64 22.23,49.56 v29.36,49.56 | U2.29_1 12.53,51.64 12.53,52.82 U2.29_2 | U2.29_4 13.71,51.64 12.6,51.64 U2.29_1 | U2.29_5 13.71,52.82 12.6,52.82 U2.29_2 | U2.29_3 12.53,54.06 12.53,52.96 U2.29_2 | U2.28 8.1,63.14 8.1,62.03 12.46,57.67 12.46,54.2 U2.29_3 | TP5.TP 3.39,31.7 8.03,36.34 8.03,45.62 U2.1 8.1,45.69 v8.1,47.21 | v10.25,49.36 12.46,51.57 U2.29_1 | 44.11,53.65 44.25,53.65 46.05,55.45 U1.9 46.12,55.45 v67.52,55.45 | 44.11,53.65 42.24,53.65 U1.4 42.17,53.65 41.2,53.65 15.51,79.34 15.51,85.3 J4.G1 15.51,85.37 15.51,86.34 16.34,87.17 16.34,90.14 15.51,90.97 J4.G2 15.44,91.04 14.61,91.88 14.61,94.78 15.03,95.2 15.03,98.87 D10.2 15.03,98.94 v11.7,102.26 | D12.2 30.82,28.58 35.11,28.58 35.18,28.65 D11.2 35.25,28.72 37.12,28.72 D8.2 37.12,28.79 37.12,44.72 41.2,48.8 42.17,48.8 42.94,49.56 43.21,49.56 D9.2 43.28,49.63 43.49,49.84 v44.11,49.84 | v44.11,51.3 44.11,53.65 | C10.2 67.03,107.87 65.79,107.87 65.72,107.94 CHANGE_BUTTON.2 65.65,107.94 62.26,107.94 CHANGE_BUTTON.1 62.19,108.01 61.91,108.01 61.49,108.43 60.39,108.43 60.18,108.22 52.28,108.22 52.08,108.01 C6.2 52.01,108.01 50.69,108.01 BOOT_BUTTON.2 50.62,107.94 49.58,107.94 | 50.07,99.98 49.58,99.49 47.85,99.49 IC1.3 | 50.07,99.98 51.94,99.98 52.08,99.84 C_DELAY.2 | 49.58,107.94 47.16,107.94 BOOT_BUTTON.1 47.09,108.01 46.95,108.01 46.4,108.56 27.7,108.56 27.15,108.01 C5.2 27.08,108.01 25.83,108.01 RESET_BUTTON.2 25.76,107.94 22.37,107.94 RESET_BUTTON.1 22.3,108.01 22.02,108.01 21.54,108.5 15.58,108.5 10.49,103.41
  Top 0.15: v50.07,100.67 50.07,99.98 | v49.58,107.87 49.58,107.94 | J4.G3 1.25,82.32 1.25,89.1 4.71,92.57 J4.P6 4.85,92.64 4.71,92.64 2.29,95.06 2.29,95.41 J4.G4 2.29,95.48 8.38,101.57 8.66,101.57 C9.2 8.73,101.64 10.49,103.41 | v10.6,103.37 10.53,103.37 10.49,103.41 | 123.4,41.11 122.3,41.11 121.26,40.08 119.8,40.08 118.83,39.11 117.45,39.11 R1_PWRUSB.1 117.45,39.18 116.13,40.49 116.13,50.46 C1_BAT.2 116.13,50.53 116.13,59.33 121.12,64.31 125.14,64.31 126.24,63.21 TP4.TP | 123.4,41.11 123.54,40.98 123.54,40.21 122.99,39.66 122.85,39.66 IC4.2 123.13,39.73 v123.68,39.18 | R2_BAT.1 123.75,45.06 123.75,41.53 123.4,41.18 123.4,41.11 | C2_BAT.2 129.43,51.23 128.32,51.23 126.66,49.56 126.38,49.56 MCP73831.2 126.31,49.56 126.1,49.56 125.55,50.12 125.55,50.88 126.31,51.64 126.31,63.21 TP4.TP | J2.B12 164.33,51.3 164.33,51.09 J2.A1 164.33,51.02 164.33,49.91 164.88,49.36 J2.MP3 164.95,49.36 166.89,49.36 | 166.89,49.36 168.76,49.36 J2.MP1 | 166.89,59.54 164.95,59.54 J2.MP4 164.88,59.47 164.33,58.91 164.33,57.8 J2.A12 164.33,57.73 164.33,57.53 J2.B1 164.26,57.46 155.4,57.46 149.37,51.43 149.37,49.77 | 166.89,59.54 168.76,59.54 J2.MP2 | 166.89,59.54 166.89,49.36 | C4_USB.2 153.94,46.59 153.94,47.69 C5_USB.2 153.87,47.42 v153.18,47.42 | v156.09,51.16 157.13,51.16 R2-USB1.1 | v153.6,50.74 153.11,50.74 152.7,50.33 D1.2 | U4.4 136.49,51.09 136.91,51.09 137.53,51.71 U4.9 | U4.9 137.53,51.78 136.84,52.47 136.49,52.47 U4.1 136.42,52.54 136.42,58.91 131.09,64.24 130.05,64.24 129.08,63.27 126.38,63.27 TP4.TP | U4.9 137.6,51.71 137.74,51.57 138.43,51.57 U4.6 138.5,51.5 138.78,51.5 140.51,49.77 149.37,49.77
  Top 0.15: 149.37,49.77 150.06,49.77 R2-USB.2 150.13,49.7 150.27,49.56 v150.27,49.01 | R2.1 64.47,13.14 64.47,11.61 64.13,11.27 SJ1.1 64.13,11.2 64.13,11.06 64.96,10.23 66.34,10.23 67.31,11.2 67.31,11.41 R4.2 67.38,11.48 79.5,11.48 80.05,12.03 J1.MP2 80.12,12.1 80.54,12.1 | 82.34,21.93 83.17,21.93 EPD_C11.2 | 82.34,21.93 81.23,21.93 EPD_C12.2 | D6.2 79.08,23.59 79.5,23.59 81.16,21.93 EPD_C12.2 | 80.54,12.1 82.55,12.1 84.55,14.11 84.55,14.52 J1.17 | 80.54,12.1 80.54,21.03 81.16,21.66 81.16,21.86 EPD_C12.2 | EPD_C8.2 88.57,22 86.84,22 EPD_C9.2 86.84,22.07 85.7,23.21 | 84.55,24.98 84.55,24.36 85.7,23.21 | 84.55,24.98 C7.2 | v89.06,15.35 89.06,14.59 J1.8 | v91.13,13.28 92.38,13.28 93.56,12.1 J1.MP1 | v85.11,22.62 85.11,21.93 EPD_C10.2 | v85.73,23.25 85.7,23.21 | C2.2 157.34,4.55 158.51,4.55 C1.2 158.58,4.48 159.21,3.86 161.49,3.86 161.63,4 161.63,6.91 160.52,8.01 160.52,9.19 SENSOR2.5 160.45,9.26 160.45,9.74 v160.11,10.09 | 158.55,9.78 158.79,9.54 158.79,9.26 SENSOR2.7 | 158.55,9.78 158.1,10.23 158.1,12.1 SENSOR2.1 158.1,12.17 158.1,12.45 159.03,13.38 | 159.03,13.38 163.22,17.57 165.23,17.57 J3.1 | 158.55,9.78 v158.86,10.09 | 123.68,37.45 129.22,37.45 129.57,37.1 C3.- 129.64,37.1 130.95,38.41 133.93,38.41 C1_BAT2.2 134,38.41 159.03,13.38 | 123.68,37.45 121.47,37.45 120.36,36.34 120.36,35.85 C1_BAT1.2 120.29,35.78 101.04,35.78 98.33,33.08 98.27,33.08 | 92.86,49.29 87.39,49.29 86.7,49.98 86.56,49.98 C8.2 86.77,49.98 v86.77,50.81 | 92.86,49.29 94.25,50.67 C10_SUPERCAP.1 | v86.01,51.57 86.42,51.99 86.42,52.96 U3.13 | EPD_C1.2 99.51,13.48 99.51,13.69 98.89,14.31 98.89,16.81 99.37,17.29 EPD_C2.2 99.31,17.29 94.73,21.86 93.9,21.86 EPD_C5.2 93.83,21.93 93,21.93
  Top 0.15: EPD_C7.2 90.37,22 92.03,22 EPD_C6.2 92.17,21.93 93,21.93 | 92.17,29.62 92.17,29.13 93,28.3 93,21.93 | 92.17,29.62 92.17,31.28 D3.2 92.24,31.28 92.93,31.97 97.99,31.97 98.27,32.25 98.27,33.08 | 92.86,49.29 92.86,38.48 98.27,33.08 | 84.55,24.98 82.55,24.98 81.3,26.23 81.3,28.65 82.27,29.62 92.17,29.62 | v82.34,21.86 82.34,21.93 | v123.68,37.51 123.68,37.45
  Bottom 0.15: v8.1,47.21 v10.25,49.36 | v44.11,51.3 v44.11,49.84 44.11,48.73 42.24,46.86 33.24,46.86 30.54,49.56 v29.36,49.56 | v50.07,100.67 50.07,107.39 v49.58,107.87 | v10.6,103.37 v11.7,102.26 | v156.09,51.16 154.01,51.16 v153.6,50.74 153.6,50.67 153.18,50.26 153.18,49.01 | 153.18,49.01 v153.18,47.42 | v150.27,49.01 153.18,49.01 | v91.13,13.28 v89.06,15.35 88.5,15.35 85.11,18.75 85.11,20.41 | 85.11,20.41 v85.11,22.62 v85.73,23.25 | v158.86,10.09 v160.11,10.09 | v86.77,50.81 v86.01,51.57 85.94,51.57 82.06,55.45 v67.52,55.45 | v82.34,21.86 82.48,21.86 83.93,20.41 85.11,20.41 | v123.68,37.51 v123.68,39.18
  pour Top: 177.72,-3.77 177.72,71.77 96.98,71.77 96.96,71.79 96.94,71.81 96.92,71.83 96.92,116.07 -9.12,116.07 -9.12,-3.77
  pour Bottom: 178.02,-4.07 178.02,71.27 96.68,71.27 96.66,71.29 96.64,71.31 96.62,71.33 96.62,116.27 -9.82,116.27 -9.82,115.82 -9.82,115.83 -9.78,115.83 -9.76,115.81 -9.74,115.79 -9.72,115.77 -9.72,-4.07
GPIO8
  Top 0.15: R1.2 19.46,42.98 19.46,45.62 U2.10
I2C_PW  (via drill 0.3)
  Top 0.15: C2.1 157.34,5.87 158.51,5.87 C1.1 158.51,5.94 158.51,8.5 | 158.51,8.5 158.1,8.91 158.1,9.19 SENSOR2.8 | 158.51,8.5 159.14,8.5 159.62,8.98 159.62,9.19 SENSOR2.6 159.62,9.26 159.62,9.95 158.86,10.71 158.86,11.2 | 158.86,11.2 158.86,12.1 SENSOR2.2 | v72.16,50.81 34.07,50.81 22.02,62.86 22.02,63.14 U2.17 | v158.79,11.2 158.86,11.2
  Bottom 0.15: v72.16,50.81 86.15,50.81 125.76,11.2 v158.79,11.2
INT_RTC  (via drill 0.3)
  Top 0.15: 86.98,63.69 86.98,63.41 87.74,62.65 U3.3 | 86.98,63.69 86.98,65.91 R1_PINH1.1 | v16.9,42.22 16.9,45.62 U2.8 16.97,45.69 17.52,46.24 v17.52,46.79 | v16.9,39.94 15.17,38.21 TP15.TP | v86.08,63.69 86.98,63.69
  Bottom 0.15: v16.9,39.94 v16.9,42.22 | v86.08,63.69 27.42,63.69 17.52,53.79 v17.52,46.79
IO/BOOT  (via drill 0.3)
  Top 0.15: C6.1 52.01,109.33 50.76,109.33 50.69,109.4 BOOT_BUTTON.3 50.62,109.4 49.31,109.4 48.34,108.43 v48.27,108.43 47.3,109.4 47.16,109.4 BOOT_BUTTON.4 47.09,109.4 47.02,109.33 45.91,109.33 R_BOOT.2 | v24.58,69.65 24.58,63.21 U2.15
  Bottom 0.15: v24.58,69.65 24.58,80.24 48.27,103.93 v48.27,108.43
IO/CHANGE  (via drill 0.3)
  Top 0.15: C10.1 67.03,109.19 65.93,109.19 65.72,109.4 CHANGE_BUTTON.3 65.65,109.47 62.26,109.47 CHANGE_BUTTON.4 62.19,109.4 61.98,109.19 60.94,109.19 R_CHANGE.2 60.87,109.12 60.52,108.77 v60.11,108.77 | v20.15,69.16 14.4,63.41 14.4,63.21 U2.23
  Bottom 0.15: v20.15,69.16 24.72,69.16 60.11,104.55 v60.11,108.77
MISO  (via drill 0.3)
  Top 0.15: v3.95,94.51 4.71,93.75 5.05,93.75 J4.P7 | v3.95,102.33 3.95,102.82 3.25,103.51 TP6.TP | R8.1 30.89,24.63 30.89,26.99 30.82,27.06 D12.1 30.75,27.13 30.05,27.82 30.05,29.13 33.38,32.46 v33.38,47.35 | v40.79,54.76 42.17,56.14 U1.2 | v30.61,50.05 22.16,50.05 9.35,62.86 9.35,63.14 U2.27 9.28,63.21 9.28,63.41 7.48,65.21 7.48,88.97 7.27,89.17 v7.27,91.11
  Bottom 0.15: v3.95,102.33 v3.95,94.51 3.95,94.44 v7.27,91.11 | v40.79,54.76 v33.38,47.35 33.31,47.35 v30.61,50.05
MOSI  (via drill 0.3)
  Top 0.15: v85.94,15.35 86.08,15.22 86.08,14.59 J1.14 | v73.34,10.37 67.93,4.97 TP7.TP | R7.1 35.46,24.77 35.46,26.92 35.25,27.13 D11.1 35.39,27.06 36.22,27.89 37.67,27.89 43.38,33.6 | v49.93,51.3 49.93,53.58 U1.5 | 43.38,33.6 v49.93,40.14 | 17.04,47.28 15.72,45.96 15.72,45.69 U2.7 | 17.04,47.28 24.72,47.28 v25.9,46.1 | v4.36,88.55 5.05,89.24 J4.P3 | v13.99,50.39 17.04,47.35 17.04,47.28 | v43.42,33.57 43.38,33.6
  Bottom 0.15: v85.94,15.35 85.25,15.35 80.26,10.37 v73.34,10.37 66.62,10.37 v43.42,33.57 | v49.93,40.14 49.93,46.1 | 49.93,46.1 v49.93,51.3 | 49.93,46.1 v25.9,46.1 | v4.36,88.55 4.36,69.51 13.99,59.88 v13.99,50.39
N$1
  Top 0.15: R2-USB1.2 157.2,52.47 163.08,52.47 163.71,53.09 164.26,53.09 J2.A5
N$2
  Top 0.15: R2-USB.1 150.13,51.09 150.55,51.09 155.6,56.14 164.26,56.14 J2.B5
N$3  (via drill 0.3)
  Top 0.15: 121.6,38.62 122.78,38.62 IC4.3 | 121.6,38.62 119.46,38.62 D2.2 | v121.6,36.96 121.6,35.85 C1_BAT1.1 | 121.6,38.62 v121.6,38.55 122,38.95 122,39.85 122.3,40.14 122.36,40.14 122.78,40.56 IC4.1 | v133.72,47.28 134,47.55 134,48.11 Q1.3
  Bottom 0.15: v121.6,36.96 v121.6,38.55 121.67,38.55 130.4,47.28 v133.72,47.28
N$4  (via drill 0.3)
  Top 0.15: v120.08,48.52 119.46,49.15 R1_BAT.1 | v125.41,49.01 125.9,49.01 126.31,48.59 MCP73831.1
  Bottom 0.15: v120.08,48.52 124.93,48.52 v125.41,49.01
N$5
  Top 0.15: CHG_LED.C 119.59,50.46 119.59,50.33 120.7,49.22 R1_BAT.2
N$6
  Top 0.15: C4.1 97.5,31.35 95.63,31.35 D3.1 95.7,31.28 95.7,27.89 D4.2
N$7
  Top 0.15: J1.24 81.09,14.59 81.09,20.48 81.16,20.55 EPD_C12.1
N$8
  Top 0.15: R2_BAT.2 123.82,46.45 123.82,48.52 MCP73831.5
N$9  (via drill 0.3)
  Top 0.15: v84.62,15.35 84.55,15.35 84.14,14.94 84.14,14.59 J1.18 | v86.22,18.95 v83.31,16.05 | v91.27,20.55 91.96,20.55 92.03,20.62 EPD_C6.1
  Bottom 0.15: v84.62,15.35 84,15.35 v83.31,16.05 | v86.22,18.95 88.92,18.95 90.51,20.55 v91.27,20.55
N$10  (via drill 0.3)
  Top 0.15: v87.53,16.95 87.32,17.16 86.28,17.16 85.04,15.91 84.55,15.91 83.65,15.01 83.65,14.59 J1.19 | v90.3,19.72 90.3,20.62 EPD_C7.1
  Bottom 0.15: v90.3,19.72 v87.53,16.95
N$11  (via drill 0.3)
  Top 0.15: v87.32,19.44 83.1,15.22 83.1,14.59 J1.20 | v87.81,20.55 88.5,20.55 88.57,20.62 EPD_C8.1
  Bottom 0.15: v87.32,19.44 87.32,20.06 v87.81,20.55
N$12
  Top 0.15: C_DELAY.1 52.08,101.16 50.9,101.16 50.69,101.36 IC1.5
N$13
  Top 0.15: J1.22 82.13,14.59 82.13,17.64 85.04,20.55 EPD_C10.1
N$14
  Top 0.15: R_CAPACITOR.2 95.63,55.1 95.63,56 97.09,57.46 D7.2
N$16  (via drill 0.3)
  Top 0.15: v88.43,16.95 87.95,16.46 87.39,16.46 86.98,16.88 86.42,16.88 85.45,15.91 85.45,15.22 85.52,15.15 85.52,14.59 J1.15 | v91.41,19.92 93.21,19.92 93.83,20.55 EPD_C5.1
  Bottom 0.15: v91.41,19.92 v88.43,16.95
N$17  (via drill 0.3)
  Top 0.15: v90.58,15.7 90.58,14.59 J1.5 | v96.88,16.05 98.13,17.29 EPD_C2.1
  Bottom 0.15: v90.58,15.7 91.27,15.7 91.62,16.05 v96.88,16.05
N$18  (via drill 0.3)
  Top 0.15: v90.58,16.32 91.06,15.84 91.06,14.59 J1.4 | v99.37,15.49 99.37,14.94 99.51,14.8 EPD_C1.1
  Bottom 0.15: v90.58,16.32 96.53,16.32 96.74,16.53 98.33,16.53 v99.37,15.49
PREVGH  (via drill 0.3)
  Top 0.15: v85.59,19.85 82.61,16.88 82.61,14.59 J1.21 | EPD_C9.1 86.77,20.69 86.01,21.45 v86.01,21.59 86.01,22.35 85.25,23.11 84,23.11 81.02,26.09 81.02,31.9 83.17,34.05 83.17,34.88 D5.2
  Bottom 0.15: v85.59,19.85 85.59,21.17 v86.01,21.59
PREVGL  (via drill 0.3)
  Top 0.15: J1.23 81.65,14.59 81.65,19.02 83.17,20.55 EPD_C11.1 83.24,20.62 83.52,20.89 v84.07,20.89 | v88.43,24.15 92.1,27.82 D4.1
  Bottom 0.15: v88.43,24.15 86.01,24.15 84.07,22.21 v84.07,20.89
RESE  (via drill 0.3)
  Top 0.15: v91.55,15.35 91.55,14.59 J1.3 | v93.9,15.56 93.9,19.51 94.6,20.2 94.6,21.03 94.32,21.31 91.48,21.31 v91.27,21.52 | v78.81,24.63 77.28,24.63 71.74,19.09 70.08,19.09 R3.1 70.01,18.95 69.87,18.82 v69.18,18.82 | v68.21,17.85 Q3.2
  Bottom 0.15: v91.55,15.35 93.69,15.35 v93.9,15.56 | v91.27,21.52 91.27,21.93 88.57,24.63 v78.81,24.63 | v69.18,18.82 v68.21,17.85
RESE'
  Top 0.15: SJ1.2 65.65,11.27 65.79,11.41 65.79,13.14 R2.2 65.86,13.21 70.01,17.36 70.01,17.71 R3.2
RESET  (via drill 0.3)
  Top 0.15: R_RESET.2 21.05,109.26 22.16,109.26 22.3,109.4 RESET_BUTTON.4 22.37,109.47 25.76,109.47 RESET_BUTTON.3 25.83,109.4 25.9,109.33 27.08,109.33 C5.1 27.15,109.26 v39.96,109.26 | v46.47,102.75 47.78,101.43 IC1.1 | v11.22,46.79 10.6,46.17 10.6,45.69 U2.3
  Bottom 0.15: v39.96,109.26 v46.47,102.75 46.47,102.68 17.24,73.45 17.24,53.03 11.22,47 v11.22,46.79
RTC_RST  (via drill 0.3)
  Top 0.15: v24.1,64.24 23.34,63.48 23.34,63.21 U2.16 | v84.9,64.24 86.42,62.72 86.42,62.31 U3.4
  Bottom 0.15: v84.9,64.24 v24.1,64.24
RX  (via drill 0.3)
  Top 0.15: v13.09,66.39 13.09,63.21 U2.24 | v5.33,74.15 4.36,75.12 TP2.TP
  Bottom 0.15: v5.33,74.15 v13.09,66.39
SCK  (via drill 0.3)
  Top 0.15: D10.1 13.5,98.94 12.05,100.39 10.39,100.39 R6.1 10.39,100.32 v10.39,96.65 | v8.1,94.37 5.26,91.53 5.12,91.53 J4.P5 | v14.34,43.12 14.34,45.62 U2.6 | v10.46,39.24 9.49,38.28 TP8.TP | v86.56,16.39 86.56,14.59 J1.13 | v50.55,54.27 50,54.83 U1.6
  Bottom 0.15: v10.39,96.65 v8.1,94.37 8.1,91.32 5.82,89.04 4.22,89.04 3.88,88.69 3.88,69.58 11.29,62.17 11.29,47.49 10.73,46.93 10.73,46.66 14.27,43.12 v14.34,43.12 | v10.46,39.24 v14.34,43.12 | v86.56,16.39 86.42,16.39 50.55,52.26 | v50.55,54.27 50.55,52.26 | v14.34,43.12 22.23,43.12 25.69,46.59 44.6,46.59 50.28,52.26 50.55,52.26
SCL  (via drill 0.3)
  Top 0.15: v160.94,6.97 160.94,5.8 R2-PINH.1 | 160.94,11.61 v160.94,11.34 | 160.94,11.61 160.45,12.1 SENSOR2.4 | v140.65,50.26 138.92,51.99 138.5,51.99 U4.7 | v140.65,45.27 165.23,20.69 J3.4 165.3,20.62 165.58,20.62 166.41,19.79 166.41,17.02 161.01,11.61 160.94,11.61 | v22.92,58.15 18.21,62.86 18.21,63.14 U2.20 | v89.61,54.2 89.61,53.65 90.23,53.03 U3.16
  Bottom 0.15: v160.94,11.34 v160.94,6.97 | v140.65,45.27 v140.65,50.26 93.63,50.26 89.68,54.2 v89.61,54.2 87.53,54.2 83.58,58.15 v22.92,58.15
SDA  (via drill 0.3)
  Top 0.15: R1-PINH.1 159.69,5.73 159.55,5.73 158.93,5.1 156.78,5.1 156.64,4.97 156.64,4.07 157.13,3.58 161.63,3.58 161.91,3.86 161.91,9.61 159.69,11.82 159.69,12.1 SENSOR2.3 159.69,12.17 159.69,12.45 164.33,17.09 165.99,17.09 166.13,17.22 166.13,19.02 165.58,19.58 165.3,19.58 J3.3 165.23,19.65 164.95,19.65 v141.27,43.33 | v141.27,50.26 139.05,52.47 138.5,52.47 U4.8 | v23.75,58.63 19.53,62.86 19.53,63.14 U2.19 | v87.67,54.69 88.99,53.37 88.99,53.03 U3.15
  Bottom 0.15: v141.27,43.33 v141.27,50.26 141.27,50.33 136.91,54.69 v87.67,54.69 83.72,58.63 v23.75,58.63
SRC  (via drill 0.3)
  Top 0.15: 87.15,34.5 86.77,34.88 D5.1 | 87.15,34.5 88.92,32.74 97.5,32.74 C4.2 | v78.05,25.39 77.63,25.39 75.34,23.11 71.95,23.11 67.17,18.33 65.93,18.33 Q3.3 | v84.21,31.26 84.97,32.02 L1.1 85.04,32.39 87.15,34.5
  Bottom 0.15: v84.21,31.26 78.34,25.39 v78.05,25.39
SS_SD  (via drill 0.3)
  Top 0.15: R10.1 37.12,24.77 37.12,27.13 D8.1 37.05,27.13 v36.08,27.13 | v6.51,64.38 6.51,87.17 5.54,88.14 J4.P2 | v9.76,49.7 9.76,48.87 11.84,46.79 11.84,45.69 U2.4 11.91,45.62 11.91,44.23 13.92,42.22 v14.06,42.22
  Bottom 0.15: v6.51,64.38 9.76,61.13 v9.76,49.7 | v36.08,27.13 29.09,27.13 14.06,42.15 v14.06,42.22
TX  (via drill 0.3)
  Top 0.15: v7.96,67.29 11.84,63.41 11.84,63.21 U2.25 | v5.82,69.44 4.71,69.44 4.43,69.72 TP1.TP
  Bottom 0.15: v5.82,69.44 v7.96,67.29
USB_D+  (via drill 0.3)
  Top 0.15: v151.66,50.88 152,51.23 152.63,51.23 D1.1 | v50.55,56.77 v86.22,56.77 | v24.58,46.79 24.58,45.69 U2.14
  Bottom 0.15: v151.66,50.88 151.66,50.67 151.87,50.46 151.87,50.19 151.52,49.84 142.31,49.84 135.38,56.77 v86.22,56.77 | v50.55,56.77 42.87,56.77 42.38,57.25 39.13,57.25 37.4,55.52 33.31,55.52 v24.58,46.79
USB_D-  (via drill 0.3)
  Top 0.15: v151.38,50.33 152.28,49.42 152.63,49.42 D1.3 | v38.36,57.11 v40.37,59.12 | v23.96,46.79 23.96,46.59 23.34,45.96 23.34,45.69 U2.13
  Bottom 0.15: v151.38,50.33 142.24,50.33 133.44,59.12 v40.37,59.12 | v38.36,57.11 34.28,57.11 v23.96,46.79
VBAT
  Top 0.3: U4.2 136.49,51.99 136.49,51.57 U4.3 136.35,51.5 136.01,51.5 133.17,48.66 | 133.17,48.66 133.17,46.03 Q1.1 | C2_BAT.1 129.43,52.54 128.39,52.54 126.38,50.53 MCP73831.3 | TP3.TP 130.54,63 130.54,53.72 129.5,52.68 C2_BAT.1 | 133.17,48.66 133.1,48.8 129.5,52.4 C2_BAT.1
VBUS
  Top 0.3: C5_USB.1 155.26,47.69 155.26,46.59 C4_USB.1 155.26,46.38 155.26,44.16 PFMF.050.1.2 155.26,44.02 153.18,41.95 149.93,41.95 149.72,42.15 149.72,45.96 | 149.72,45.96 150.83,47.07 150.83,50.81 151.87,51.85 153.39,51.85 153.53,51.71 153.53,51.57 154.77,50.33 D1.5 | 118.28,40.35 119.11,40.35 119.39,40.63 D2.1 | 118.28,40.35 117.45,40.35 R1_PWRUSB.2 | 118.28,50.53 118.42,50.53 119.11,51.23 120.36,51.23 | 118.28,50.53 117.45,50.53 C1_BAT.1 | 120.36,51.23 120.98,50.6 CHG_LED.A 121.12,50.53 123.75,50.53 MCP73831.4 123.89,50.39 123.89,49.77 128.39,45.27 133.65,45.27 134.34,45.96 134.97,45.96 Q1.2 135.11,46.03 149.58,46.03 149.72,45.96 | 118.28,50.53 118.28,40.35 | TP14.TP 121.53,63 121.53,52.47 120.43,51.36 120.36,51.23
VRTC
  Top 0.3: R_CAPACITOR.1 94.32,55.03 94.32,52.96 C10_SUPERCAP.2 94.11,52.89 91.89,52.89 90.65,51.64 87.81,51.64 | 87.81,51.64 87.81,52.96 U3.14 | 87.81,51.64 87.81,50.05 C8.1
VUSB
  Top 0.3: J2.A9 164.33,56.9 164.33,56.7 J2.B4 164.47,56.63 165.02,56.63 165.23,56.42 165.23,52.4 165.02,52.2 164.47,52.2 J2.B9 164.33,52.13 164.33,51.92 J2.A4 164.19,51.85 159.07,51.85 155.67,48.45 153.46,48.45 150.83,45.82 150.83,44.09 PFMF.050.1.1